# Altium PCB HandheldCon.PcbDoc
Units mm, origin at the board's own origin, x right, y up, seen from the top; angles counter-clockwise.
Board outline 100 x 100 mm, 2 copper layers (Top Layer, Bottom Layer); 45 components, 53 nets, 273 pads, 0 vias.
Unrouted connection lines stored in the file: 81.
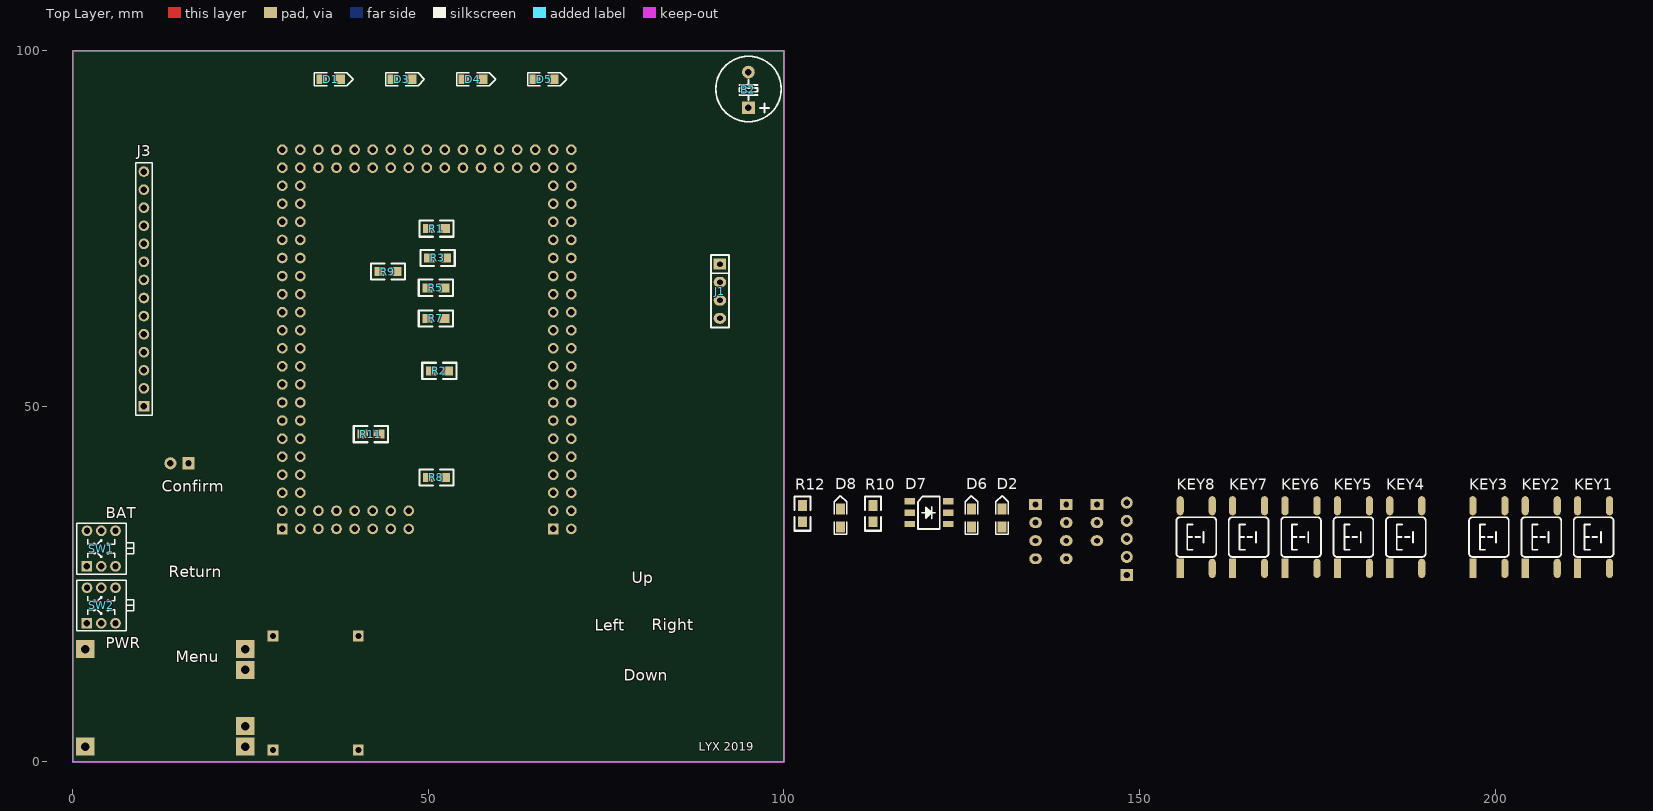
[diagram p0: Top Layer view]
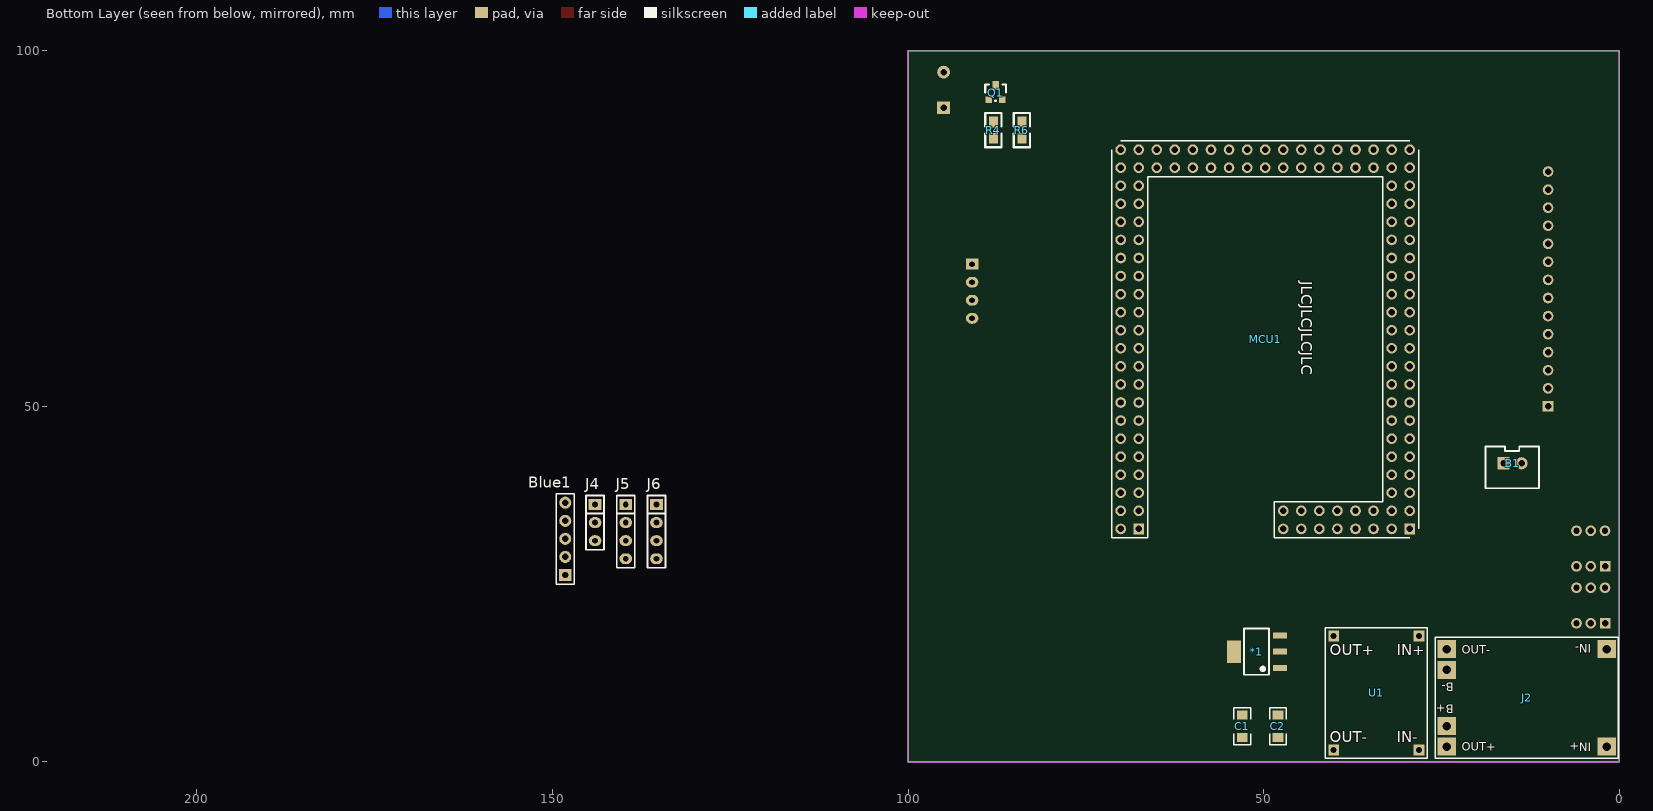
[diagram p1: Bottom Layer view, seen from below]

## Layer stack, top to bottom
Top Solder: solder mask 0.0102, Solder Resist, Dk 3.5
Top Layer: signal copper 0.0356
Dielectric 1: dielectric 0.32, FR-4, Dk 4.8
Bottom Layer: signal copper 0.0356
Bottom Solder: solder mask 0.0102, Solder Resist, Dk 3.5

## Board outline
0,0 0,100 100,100 100,0

## Design rules (kind name [scope] priority, off if disabled: settings)
Clearance [All] p1: gap=0.254 ignorepadtopadclearanceinfootprint=TRUE
DiffPairsRouting [All] p1: maxlimit=8 minlimit=0.254 mostfreqgap=0.254 toplayer_minwidth=0.381 toplayer_maxwidth=8 toplayer_prefwidth=0.381 bottomlayer_minwidth=0.381 bottomlayer_maxwidth=8 bottomlayer_prefwidth=0.381 maxuncoupledlength=12.7
HoleSize [All] p1: absolutevalues=TRUE maxlimit=6.35 minlimit=0.3 maxpercent=80.000 minpercent=20.000
MinimumSolderMaskSliver [All] p1: minsoldermaskwidth=0.152
PasteMaskExpansion [All] p1: expansion=0.15
PolygonConnect [All] p1: connectstyle=Relief reliefconductorwidth=0.254 reliefentries=4 polygonreliefangle="90 Angle" airgapwidth=0.254
RoutingVias [All] p1: holewidth=0.711 width=1.27 viastyle="Through Hole" minholewidth=0.3 minwidth=0.6 maxholewidth=6.35 maxwidth=7
SilkToSilkClearance [All] p1: silktosilkclearance=0
SilkToSolderMaskClearance [IsPad] p1: minsilkscreentomaskgap=0 clearancetoexposedcopper=TRUE
SolderMaskExpansion [All] p1: expansion=0.102
Width [All] p1: maxlimit=2.54 minlimit=0.254 preferedwidth=0.254
24 further rules are at their usual default settings.

## Components (designator, comment, footprint, x,y, rotation, side; value= is the part's Value field where it differs from the comment)
*1 "3Vout" ASM1117_3.3V 51,15.5 r90 bottom
B1 "Bat" XH2.54-LI-2P 15,42 r180 bottom
B2 "BEEP" "BEEP 5x9x5.5" 95,92 r90 top
Blue1 "J？" HDR2.54-M-LI-5P 148.209,31.369 r90 bottom
C1 "C 1uF" 1206C 53,5 r270 bottom
C2 "C  1uF" 1206C 48,5 r270 bottom
D1 "LED" LED-0805R 35,96 r0 top
D2 "LED" LED-0805R 130.683,33.02 r90 top
D3 "LED" LED-0805Y 45,96 r0 top
D4 "LED" LED-0805B 55,96 r0 top
D5 "LED" LED-0805G 65,96 r0 top
D6 "LED" LED-0805G 126.365,33.02 r90 top
D7 "LED-5050" LED-5050W 117.729,36.703 r0 top
D8 "LED" LED-0805G 107.95,33.02 r90 top
J1 "Female HDR1X4" Fe-HDR1X4/2.54-S 91,70 r0 top
J2 "MK301" TP4056 13,9 r270 bottom
J3 "Female HDR1X14" Fe-HDR1X14/2.54-S 10,50 r180 top
J4 "Female HDR1X3" Fe-HDR1X3/2.54-S 144.018,36.195 r180 bottom
J5 "Female HDR1X4" Fe-HDR1X4/2.54-S 139.7,36.195 r180 bottom
J6 "Female HDR1X4" Fe-HDR1X4/2.54-S 135.382,36.195 r180 bottom
KEY1 "KEY" "TSW SMD-6*6*8" 213.868,31.623 r90 top
KEY2 "KEY" "TSW SMD-6*6*8" 206.502,31.623 r90 top
KEY3 "KEY" "TSW SMD-6*6*8" 199.136,31.623 r90 top
KEY4 "KEY" "TSW SMD-6*6*8" 187.452,31.623 r90 top
KEY5 "KEY" "TSW SMD-6*6*8" 180.086,31.623 r90 top
KEY6 "KEY" "TSW SMD-6*6*8" 172.72,31.623 r90 top
KEY7 "KEY" "TSW SMD-6*6*8" 165.354,31.623 r90 top
KEY8 "KEY" "TSW SMD-6*6*8" 157.988,31.623 r90 top
MCU1 "MCU1" 核心板底座 26.289,29.591 r90 bottom
Q1 "PNP 8550" SOT-23 87.757,94 r180 bottom
R1 "RES 470R" 0805R 50,75 r0 top
R2 "RES 470R" 0805R 50.419,54.991 r0 top
R3 "RES 470R" 0805R 50.165,70.866 r0 top
R4 "RES 470R" 0805R 88,90 r270 bottom
R5 "RES 470R" 0805R 49.911,66.675 r0 top
R6 "RES 22R" 0805R 84,90 r270 bottom
R7 "RES 470R" 0805R 49.911,62.357 r0 top
R8 "RES 470R" 0805R 50,40 r0 top
R9 "RES 470R" 0805R 43.18,68.961 r0 top
R10 "RES 470R" 0805R 112.522,33.782 r90 top
R11 "RES 470R" 0805R 40.767,46.101 r0 top
R12 "RES 470R" 0805R 102.616,33.782 r90 top
SW1 "KFT" "KFT DIP-7X7" 4,30 r0 top
SW2 "KFT" "KFT DIP-7X7" 4,22 r0 top
U1 "DCDC升压模块" DCDC升压5V 34,9.5 r180 bottom

## Footprints (in the part's own frame and the unit in brackets; to place one, negate y for a bottom-side part, rotate by r counter-clockwise, add the part's x,y. Pads: shape width x height; smd on the part's side, far side on the other; paste and mask are expansions set on the pad)
0805R [mil]
  rect 60x50 smd: 1(0,0) 2(90,0)
  silkscreen extent -50,-45 140,45, body extent 1,-25 80,25, height 15
1206C [mil] "3.2mmx1.6mm（蒜米工坊）"
  rect 50x60 smd: 1(-62,0) 2(62,0)
  silkscreen extent -103,-46 103,46, body extent -64,-32 62,31, height 24
ASM1117_3.3V [mm] "6.4x7x1.6mm(长宽高)"
  rect 0.85x2 smd: 1(-2.3,-3.302) 2(0,-3.302) 3(2.3,-3.302)
  rect 3.2x2 smd: 5(0,3.175)
  silkscreen extent -3.25,-1.75 3.25,1.75, body extent -3.25,-3.51 3.25,3.51, height 1.65
"BEEP 5x9x5.5" [mm]
  rect 1.8x1.8 hole 0.9: 1(0,0)
  round 1.8 hole 0.9: 2(5,0)
  silkscreen extent -1.97,-4.62 7.22,4.58, body extent -1.96,-4.44 7.04,4.55, height 5.45
DCDC升压5V [mm]
  rect 1.524x1.524 hole 0.85: 1(-6.15,8.2) 2(-6.15,-7.8) 3(5.85,-7.8) 4(5.85,8.2)
  silkscreen extent -7.3,-8.95 7,9.35
Fe-HDR1X3/2.54-S [mil]
  rect 70x60 hole 32: 1(0,0)
  oval 70x60 hole 32: 2(0,-100) 3(0,-200)
  silkscreen extent -50,-250 50,50, body extent -50,-255 48,55, height 335
Fe-HDR1X4/2.54-S [mil]
  rect 70x60 hole 32: 1(0,0)
  oval 70x60 hole 32: 2(0,-100) 3(0,-200) 4(0,-300)
  silkscreen extent -50,-350 50,50, body extent -44,-355 54,55, height 335
Fe-HDR1X14/2.54-S [mm]
  rect 1.5x1.5 hole 0.9: 1(0,0)
  round 1.5 hole 0.9: 2(0,-2.54) 3(0,-5.08) 4(0,-7.62) 5(0,-10.16) 6(0,-12.7) 7(0,-15.24) 8(0,-17.78) 9(0,-20.32) 10(0,-22.86) 11(0,-25.4) 12(0,-27.94) 13(0,-30.48) 14(0,-33.02)
  silkscreen extent -1.14,-34.29 1.14,1.27, body extent -1.23,-34.41 1.27,1.4, height 3.2
HDR2.54-M-LI-5P [mm] "排母，5脚"
  rect 1.7x1.7 hole 0.9: 1(-5.08,0)
  round 1.7 hole 0.9: 2(-2.54,0) 3(0,0) 4(2.54,0) 5(5.08,0)
  silkscreen extent -6.35,-1.27 6.35,1.27, body extent -6.35,-1.27 6.35,1.27, height 8.5
"KFT DIP-7X7" [mm] "自锁开关，规格：7*7mm"
  rect 1.5x1.5 hole 0.9: 1(-2.032,-2.5)
  round 1.5 hole 0.9: 2(0,-2.5) 3(2,-2.5) 4(2,2.5) 5(0,2.5) 6(-2,2.5)
  silkscreen extent -3.42,-3.58 4.58,3.56, body extent -3.5,-3.5 3.5,3.5, height 11.2
LED-0805B [mil]
  rect 60x50 smd: A(0,0) K(100,0)
  silkscreen extent -40,-35 175,35, body extent 10,-25 89,25, height 32
LED-0805G [mil]
  rect 60x50 smd: A(0,0) K(100,0)
  silkscreen extent -40,-35 175,35, body extent 11,-24 89,25, height 32
LED-0805R [mil]
  rect 60x50 smd: A(0,0) K(100,0)
  silkscreen extent -40,-35 175,35, body extent 11,-24 89,25, height 32
LED-0805Y [mil]
  rect 60x50 smd: A(0,0) K(100,0)
  silkscreen extent -40,-35 175,35, body extent 11,-26 89,23, height 32
LED-5050W [mm]
  rect 1.5x0.9 smd: 1(-0.038,-0.051) 2(5.372,-0.051) 3(-0.038,-1.651) 4(5.372,-1.651) 5(-0.038,-3.251) 6(5.372,-3.251)
  silkscreen extent 1.14,-3.94 4.19,0.64, body extent -0.03,-4.11 5.37,0.89, height 1.65
SOT-23 [mil]
  rect 36x36 smd: B(-35,-35) E(40,-35)
  rect 36x50 smd: C(3,45)
  silkscreen extent -55,-40 60,50, body extent -54,-48 60,62, height 47
TP4056 [mm] "充电保护模块"
  rect 2.54x2.54 hole 1.2: 1(-6.85,11.25) 2(-6.85,-11.25) 3(-3.95,-11.25) 4(3.95,-11.25) 5(6.85,-11.25) 6(6.85,11.25)
  silkscreen extent -8.5,-12.9 8.5,12.9
"TSW SMD-6*6*8" [mm] "6*6*8mm"
  rect 2.7x1 smd: 1(-4.4,2.261)
  oval 2.7x1 smd: 2(-4.4,-2.239) 3(4.4,-2.239) 4(4.4,2.261)
  silkscreen extent -2.79,-2.79 2.79,2.79, body extent -4.5,-3 4.5,3, height 7.95
XH2.54-LI-2P [mm] "接插件，2P"
  rect 1.7x1.7 hole 0.9: 1(-1.27,0)
  round 1.7 hole 0.9: 2(1.27,0)
  silkscreen extent -3.81,-3.51 3.74,2.37, body extent -3.77,-3.3 3.77,2.4, height 7.05
核心板底座 [mm]
  rect 1.5x1.5 hole 0.9: 1(3.175,41.275) 114(3.175,3.175)
  round 1.5 hole 0.9: 2(3.175,43.815) 3(5.715,41.275) 4(5.715,43.815) 5(8.255,41.275) 6(8.255,43.815) 7(10.795,41.275) 8(10.795,43.815) 9(13.335,41.275) 10(13.335,43.815) 11(15.875,41.275) 12(15.875,43.815) 13(18.415,41.275) 14(18.415,43.815) 15(20.955,41.275) 16(20.955,43.815) 17(23.495,41.275) 18(23.495,43.815) 19(26.035,41.275) 20(26.035,43.815) 21(28.575,41.275) 22(28.575,43.815) 23(31.115,41.275) 24(31.115,43.815) 25(33.655,41.275) 26(33.655,43.815) 27(36.195,41.275) 28(36.195,43.815) 29(38.735,41.275) 30(38.735,43.815) 31(41.275,41.275) 32(41.275,43.815) 33(43.815,41.275) 34(43.815,43.815) 35(46.355,41.275) 36(46.355,43.815) 37(48.895,41.275) 38(48.895,43.815) 39(51.435,41.275) 40(51.435,43.815) 41(53.975,41.275) 42(53.975,43.815) 43(56.515,41.275) 44(56.515,43.815) 45(53.975,38.735) 46(56.515,38.735) 47(53.975,36.195) 48(56.515,36.195) 49(53.975,33.655) 50(56.515,33.655) 51(53.975,31.115) 52(56.515,31.115) 53(53.975,28.575) 54(56.515,28.575) 55(53.975,26.035) 56(56.515,26.035) 57(53.975,23.495) 58(56.515,23.495) 59(53.975,20.955) 60(56.515,20.955) 61(53.975,18.415) 62(56.515,18.415) 63(53.975,15.875) 64(56.515,15.875) 65(53.975,13.335) 66(56.515,13.335) 67(53.975,10.795) 68(56.515,10.795) 69(53.975,8.255) 70(56.515,8.255) 71(56.515,5.715) 72(56.515,3.175) 73(53.975,5.715) 74(53.975,3.175) 75(51.435,5.715) 76(51.435,3.175) 77(48.895,5.715) 78(48.895,3.175) 79(46.355,5.715) 80(46.355,3.175) 81(43.815,5.715) 82(43.815,3.175) 83(41.275,5.715) 84(41.275,3.175) 85(38.735,5.715) 86(38.735,3.175) 87(36.195,5.715) 88(36.195,3.175) 89(33.655,5.715) 90(33.655,3.175) 91(31.115,5.715) 92(31.115,3.175) 93(28.575,5.715) 94(28.575,3.175) 95(26.035,5.715) 96(26.035,3.175) 97(23.495,5.715) 98(23.495,3.175) 99(20.955,5.715) 100(20.955,3.175) 101(18.415,5.715) 102(18.415,3.175) 103(15.875,5.715) 104(15.875,3.175) 105(13.335,5.715) 106(13.335,3.175) 107(10.795,5.715) 108(10.795,3.175) 109(8.255,5.715) 110(8.255,3.175) 111(5.715,5.715) 112(5.715,3.175) 113(3.175,5.715) 115(5.715,8.255) 116(3.175,8.255) 117(5.715,10.795) 118(3.175,10.795) 119(5.715,13.335) 120(3.175,13.335) 121(5.715,15.875) 122(3.175,15.875) 123(5.715,18.415) 124(3.175,18.415) 125(5.715,20.955) 126(3.175,20.955)
  silkscreen extent 1.91,1.9 57.78,45.09

## Part data
*1: library part LM1117
B1: library part Bettry
B2: "蜂鸣器"
Blue1: library part BlueTooth_net
C1 C2: library part CAP1206, "Capacitor"
KEY1 KEY2 KEY3 KEY4 KEY5 KEY6 KEY7 KEY8: library part TSW_6X6-SMT, "Tact Switch"
MCU1: library part 核心板插座
Q1: library part PNP, "PNP三极管"
R1 R2 R3 R4 R5 R6 R7 R8 R9 R10 R11 R12: library part RES
SW1 SW2: library part KFT_7X7-DIP, "Self-locking Switch"

## Nets (pads, with @x,y where several pads share a name; then routed paths per layer and width w, separated by ;. In a path a pad name is that pad's centre, name@x,y a point inside that pad or via, vN(x,y) a via of type N, cw(c..) or ccw(c..) an arc to the next point about the centre after c; other vN are vias at no path point)
3V3: *1.2 B2.1 C2.1 D1.A D3.A D4.A D5.A D6.A D8.A J3.14 MCU1.3
5V: *1.3 Blue1.2 C1.1 J4.3 J5.4 J6.4 U1.1
ADC1_IN1: J4.1 MCU1.94
ADC2_IN2: J6.1 MCU1.93
GND: *1.1 Blue1.3 C1.2 C2.2 D7.2 D7.4 D7.6 J2.2 J3.13 J4.2 J5.1 J6.3 KEY1.2 KEY2.2 KEY3.2 KEY4.2 KEY5.2 KEY6.2 KEY7.2 KEY8.2 MCU1.1 R2.1 R6.2 U1.2 U1.3
I2C1_SCL: J5.3 MCU1.8
I2C1_SDA: J5.2 MCU1.7
NetB1_1: B1.1 J2.3
NetB1_2: B1.2 SW1.4
NetB2_2: B2.2 Q1.C
NetD1_K: D1.K R1.2
NetD2_K: D2.K R2.2
NetD3_K: D3.K R3.2
NetD4_K: D4.K R5.2
NetD5_K: D5.K R7.2
NetD6_K: D6.K R9.2
NetD7_1: D7.1 R8.2
NetD7_3: D7.3 R10.2
NetD7_5: D7.5 R12.2
NetD8_K: D8.K R11.2
NetJ2_4: J2.4 SW1.5
NetQ1_B: Q1.B R4.1
NetQ1_E: Q1.E R6.1
NetSW2_4: SW2.4 U1.4
PA4: J3.10 MCU1.91
PA5: J3.8 MCU1.90
PA6: J3.6 MCU1.89
PA7: J3.9 MCU1.88
PB0: J3.7 MCU1.85
PB1: MCU1.84 R9.1
PB2: MCU1.83 R11.1
PB3: KEY4.1 MCU1.11
PC4: J3.11 MCU1.87
PC5: J3.12 MCU1.86
PC11: KEY7.1 MCU1.28
PC12: KEY8.1 MCU1.27
PD0: KEY1.1 MCU1.26
PD2: KEY3.1 MCU1.24
PD4: KEY5.1 MCU1.22
PD5: KEY6.1 MCU1.21
PF1: KEY2.1 MCU1.115
PG10: MCU1.17 R1.1
PG11: MCU1.16 R3.1
PG12: MCU1.15 R5.1
PG13: MCU1.14 R7.1
PG14: MCU1.13 R4.2
TIM2_CH4: D2.A MCU1.92
TIM3_CH1: MCU1.41 R8.1
TIM3_CH2: MCU1.40 R10.1
TIM3_CH3: MCU1.42 R12.1
USART1_RX: Blue1.4 MCU1.36
USART1_TX: Blue1.5 MCU1.35
VCC: J2.5 SW2.5
pads on no net: *1.5 Blue1.1 J1.1 J1.2 J1.3 J1.4 J2.1 J2.6 J3.1 J3.2 J3.3 J3.4 J3.5 J6.2 KEY1.3 KEY1.4 KEY2.3 KEY2.4 KEY3.3 KEY3.4 KEY4.3 KEY4.4 KEY5.3 KEY5.4 KEY6.3 KEY6.4 KEY7.3 KEY7.4 KEY8.3 KEY8.4 MCU1.2 MCU1.4 MCU1.5 MCU1.6 MCU1.9 MCU1.10 MCU1.12 MCU1.18 MCU1.19 MCU1.20 MCU1.23 MCU1.25 MCU1.29 MCU1.30 MCU1.31 MCU1.32 MCU1.33 MCU1.34 MCU1.37 MCU1.38 MCU1.39 MCU1.43 MCU1.44 MCU1.45 MCU1.46 MCU1.47 MCU1.48 MCU1.49 MCU1.50 MCU1.51 MCU1.52 MCU1.53 MCU1.54 MCU1.55 MCU1.56 MCU1.57 MCU1.58 MCU1.59 MCU1.60 MCU1.61 MCU1.62 MCU1.63 MCU1.64 MCU1.65 MCU1.66 MCU1.67 MCU1.68 MCU1.69 MCU1.70 MCU1.71 MCU1.72 MCU1.73 MCU1.74 MCU1.75 MCU1.76 MCU1.77 MCU1.78 MCU1.79 MCU1.80 MCU1.81 MCU1.82 MCU1.95 MCU1.96 MCU1.97 MCU1.98 MCU1.99 MCU1.100 MCU1.101 MCU1.102 MCU1.103 MCU1.104 MCU1.105 MCU1.106 MCU1.107 MCU1.108 MCU1.109 MCU1.110 MCU1.111 MCU1.112 MCU1.113 MCU1.114 MCU1.116 MCU1.117 MCU1.118 MCU1.119 MCU1.120 MCU1.121 MCU1.122 MCU1.123 MCU1.124 MCU1.125 MCU1.126 SW1.1 SW1.2 SW1.3 SW1.6 SW2.1 SW2.2 SW2.3 SW2.6

## Polygon pours and split planes (outlines as drawn)
GND on Bottom Layer "Top Layer-No Net" (solid, shelved, pour order 11): 0,0 0,100 100,100 100,0
GND on Top Layer "Top Layer-No Net1" (solid, shelved, pour order 12): 0,0 0,100 100,100 100,0

## Keep-outs
Keep-Out Layer:
  the board outline again, w0.254

## Silkscreen, mask and mechanical layers (free items; w line width, h text height)
Top Overlay:
  text "Confirm" at 12.5,38 h1.6
  text "BAT" at 4.6,34.29 h1.52
  text "Return" at 13.5,26 h1.6
  text "Up" at 78.613,25.146 h1.6
  text "Right" at 81.407,18.542 h1.6
  text "Left" at 73.406,18.415 h1.6
  text "PWR" at 4.6,16 h1.52
  text "Menu" at 14.5,14 h1.6
  text "Down" at 77.47,11.43 h1.6
  text "LYX 2019" at 88,1.6 h1.2
Bottom Overlay:
  text "JLCJLCJLCJLC" at 44.704,67.564 h1.52 r90

## Text inside footprints (layer, text, board x,y; h text height)
J2: Bottom Overlay "IN+" at 3.9,2.7 h1.2 r180; Bottom Overlay "IN-" at 3.9,16.55 h1.2 r180; Bottom Overlay "B+" at 23.25,8.05 h1.2 r180; Bottom Overlay "B-" at 23.25,11.15 h1.2 r180; Bottom Overlay "OUT+" at 22.15,1.6 h1.2; Bottom Overlay "OUT-" at 22.15,15.2 h1.2
U1: Bottom Overlay "IN+" at 31.3,15 h1.52; Bottom Overlay "IN-" at 31.3,2.8 h1.52; Bottom Overlay "OUT-" at 40.7,2.8 h1.52; Bottom Overlay "OUT+" at 40.7,15 h1.52